# EAGLE board electronics_pom (EAGLE 6.4)

Size 100 x 80 mm. Coordinates in mm from the lower left corner, seen from the top.
Outline: 0,0 100,0 100,80 0,80 0,0
Copper layers (1*16): Top 0.035mm / dielectric 1.5mm / Bottom 0.035mm
Design rules "default": minimum track width 10mil, minimum drill 24mil, track to track 8mil, track to pad 8mil, pad to pad 8mil, via to via 8mil, smd to smd 8mil, copper to edge 40mil, drill to drill 8mil, minimum pad ring 10mil, minimum via ring 8mil, stop-mask expansion 4mil, vias tented up to drill 0mil, thermal gap 10mil

## Footprints (pad centres in the part's own frame; a part is rotated, then mirrored left to right if it is on the bottom)
CAP-PTH-SMALL = drill 0.7 pad 1.651: 1 0,0; 2 2.54,0
E5-13 = drill 1.016 pad 2.54: + -2.54,0 | drill 1.016 pad 2.54 octagon: - 2.54,0
DIODE-1N4001 = drill 1 pad 1.981: A -5.08,0; C 5.08,0
TO92 = drill 0.813 octagon: 1 -1.27,0; 2 0,1.905; 3 1.27,0
1X4MTA = drill 1.676 long: 1 5.944,0; 2 1.981,0; 3 -1.981,0; 4 -5.944,0
1X5MTA = drill 1.676 long: 1 7.925,0; 2 3.962,0; 3 0,0; 4 -3.962,0; 5 -7.925,0
1X2MTA = drill 1.676 long: 1 1.981,0; 2 -1.981,0
1X03_LONGPADS = drill 1.118 pad 1.88 long: 1 0,0; 2 2.54,0; 3 5.08,0
1X10 = drill 1.016 pad 1.88: 1 0,0; 2 2.54,0; 3 5.08,0; 4 7.62,0; 5 10.16,0; 6 12.7,0; 7 15.24,0; 8 17.78,0; 9 20.32,0; 10 22.86,0
BNC = drill 2.2: 3 -5.08,5.08; 4 5.08,5.08 | drill 0.8 long: GND -2.54,0; S 0,0
TO220BH = drill 1.118 long: D 0,-6.35; G -2.54,-6.35; S 2.54,-6.35 | hole 3.302: 0,11.176
AXIAL-0.4 = drill 0.9 pad 1.88: P$1 -5.08,0; P$2 5.08,0
AK500/2 = drill 1.321 long: 1 -2.515,0; 2 2.515,0

## Placement (x,y rotation side)
C2  0.1u  [CAP-PTH-SMALL]  15.24,5.08 0 top
C3  0.1u  [CAP-PTH-SMALL]  54.61,72.39 0 top
C4  0.1u  [CAP-PTH-SMALL]  77.47,36.83 0 top
C5  2200u  [E5-13]  27.94,39.37 0 top
D2  [DIODE-1N4001]  15.24,11.43 0 top
D3  [DIODE-1N4001]  82.55,21.59 0 top
D4  [DIODE-1N4001]  46.99,72.39 0 top
IC2  78L05Z  [TO92]  59.69,43.18 0 top
J1  [1X4MTA]  49.53,63.5 0 top
J2  [1X4MTA]  49.53,48.26 0 top
J3  [1X5MTA]  52.07,33.02 0 top
J4  [1X4MTA]  49.53,17.78 0 top
J5  [1X2MTA]  22.86,12.7 0 top
J6  [1X2MTA]  6.35,19.05 0 top
JP2  [1X03_LONGPADS]  7.62,38.1 90 top
JP3  [1X03_LONGPADS]  15.24,35.56 270 top
JP4  M10"  [1X10]  17.78,16.51 0 top
PH-METER  BNCPTH  [BNC]  8.89,57.15 0 top
Q1  IRLZ44Z  [TO220BH]  83.82,64.77 0 top
Q2  IRLZ44Z  [TO220BH]  69.85,64.77 0 top
R1  10k  [AXIAL-0.4]  34.29,6.35 0 top
R2  2k  [AXIAL-0.4]  35.56,7.62 0 top
R3  2k  [AXIAL-0.4]  45.72,77.47 0 top
X3  [AK500/2]  95.25,45.72 90 top
X4  [AK500/2]  45.72,46.99 0 top
X5  [AK500/2]  27.94,71.12 0 top
X6  [AK500/2]  95.25,35.56 90 top

## Library data of the parts
C2-C4 = SparkFun-Capacitors
C5 = rcl
D2-D4 = SparkFun-DiscreteSemi
IC2 = linear
J1-J6 = con-amp
JP2-JP4 PH-METER = SparkFun-Connectors
Q1 Q2 = transistor-power
R1-R3 = SparkFun-Passives
X3-X6 = con-ptr500; OC_FARNELL: unknown; OC_NEWARK: unknown

## Nets
3V3: J2.1 J3.1 J3.5 J4.2 JP4.1
12V: C2.2 C3.2 C5.+ D2.C D3.C D4.C IC2.3 J6.2 X3.2 X5.1 X6.2
GND: C4.1 C5.- IC2.2 J1.1 J2.2 J3.2 J4.1 J5.1 J6.1 JP2.3 JP3.3 JP4.2 PH-METER.GND Q1.S Q2.S R2.P$1 R3.P$1 X4.1 X5.2
INT1: JP4.3
IO36: J5.2 R1.P$2
M_D: C3.1 Q2.D X6.1
M_PN: C2.1 D2.A Q1.D X3.1
PRB: JP3.2 PH-METER.S
PWM4: Q2.G R3.P$2
PWM9: Q1.G R2.P$2
RX3: JP2.2
S$1: J1.2 R1.P$1
SCL: J1.3 J2.3 J3.3 J4.3 JP4.5
SDA: J1.4 J2.4 J3.4 J4.4 JP4.6
TX3: JP2.1
VIN_UC: C4.2 D3.A IC2.1 X4.2

## Tracks (layer width: path | path; a pad name or v marks a point on that pad's centre or on a via)
3V3  (4 unrouted)
12V  (10 unrouted)
GND  (18 unrouted)
IO36  (1 unrouted)
M_D  (2 unrouted)
M_PN  (3 unrouted)
PRB  (1 unrouted)
PWM4  (1 unrouted)
PWM9  (1 unrouted)
S$1  (1 unrouted)
SCL  (4 unrouted)
SDA  (4 unrouted)
VIN_UC  (3 unrouted)